# EAGLE board EasyBMS_Panel (EAGLE 9.6.2), part 1 of 2
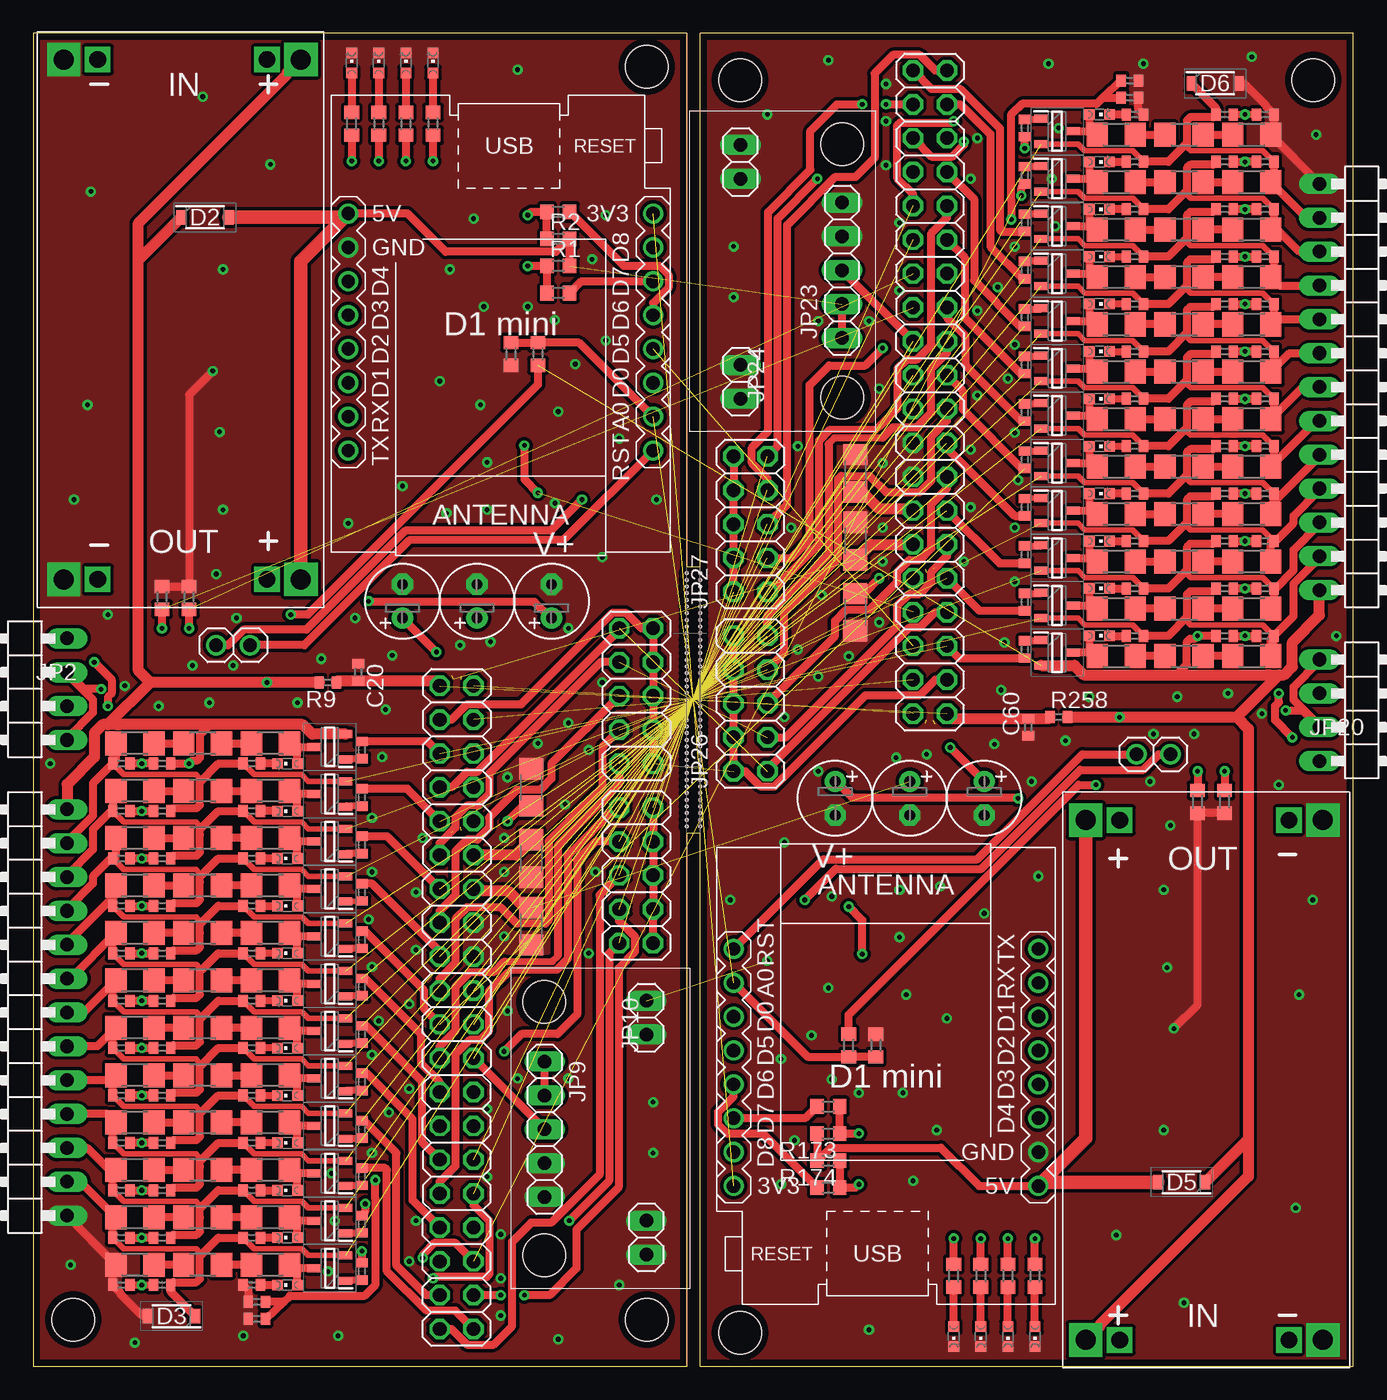
[diagram p0: board, top side]
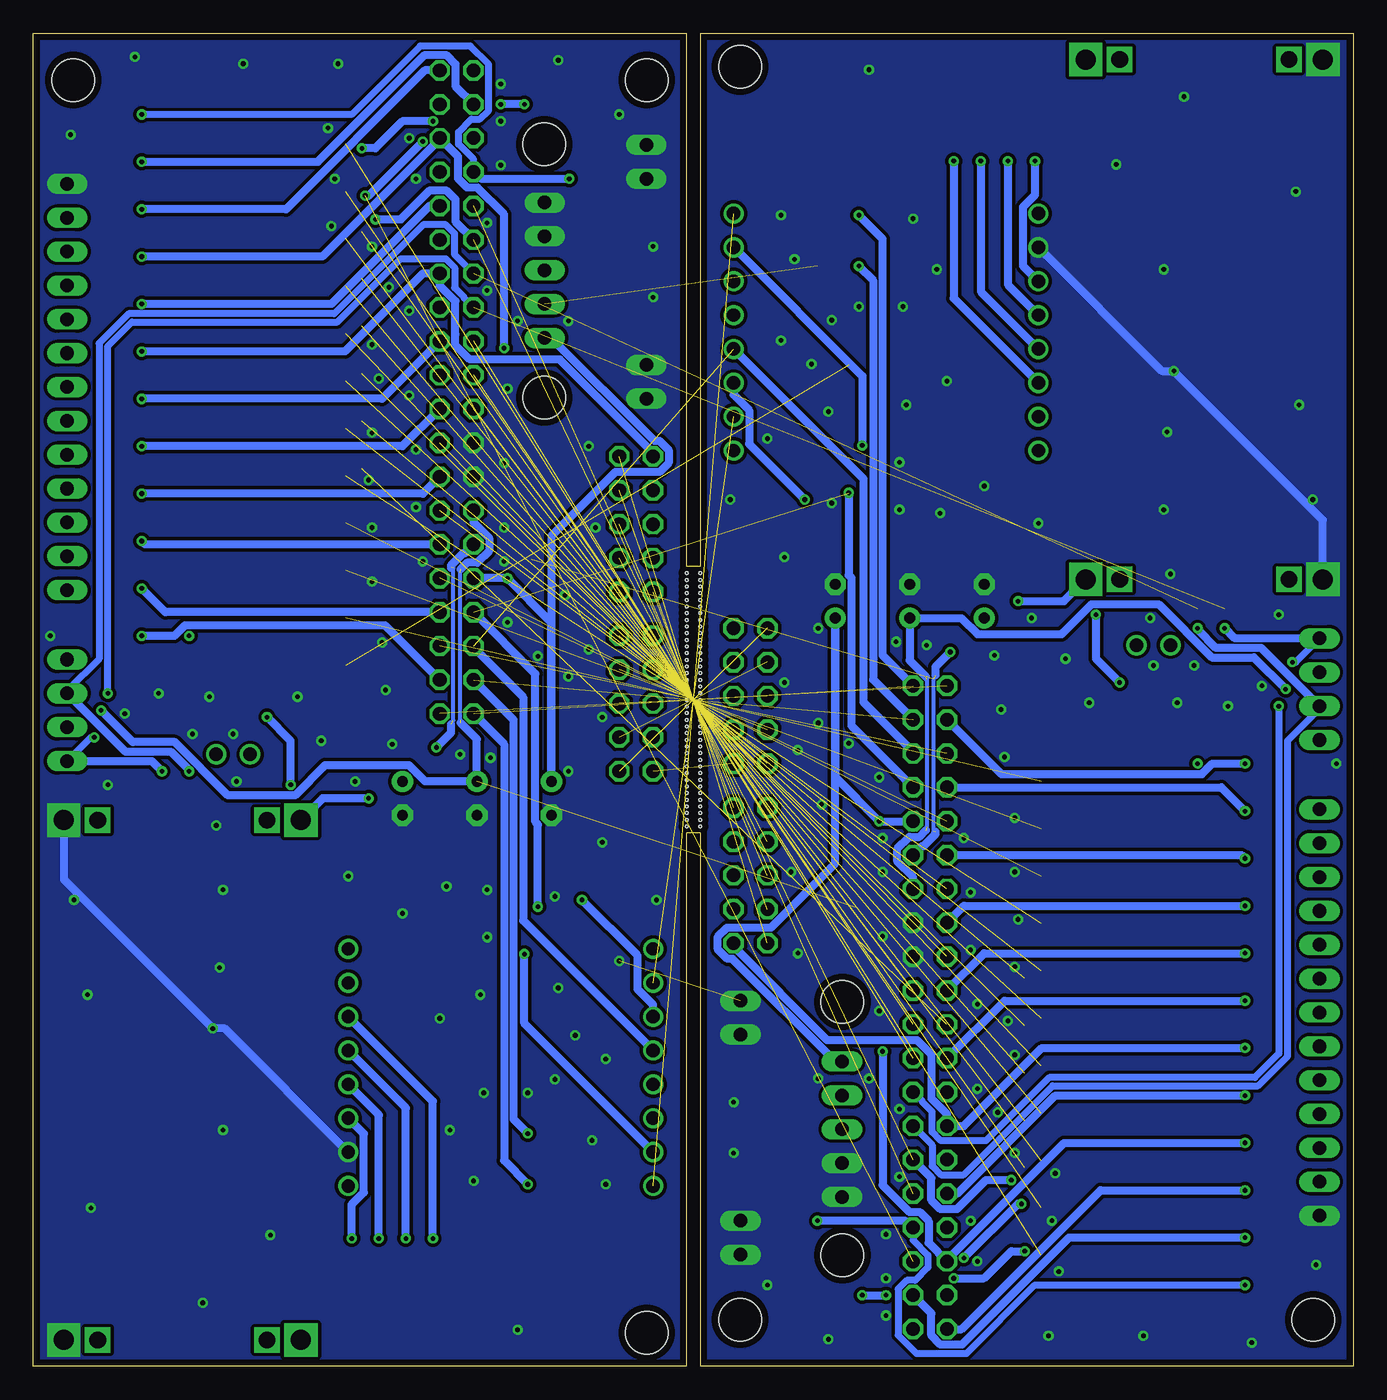
[diagram p1: board, bottom side, seen from below]

Size 99 x 100 mm. Coordinates in mm from the lower left corner, seen from the top.
Outline: 0,100 0,0 49,0 49,40 50,40 50,0 99,0 99,100 50,100 50,60 49,60 49,100 0,100
Copper layers (1*16): Top 0.035mm / dielectric 1.5mm / Bottom 0.035mm
Design rules "default *": minimum track width 11mil, minimum drill 0.2mm, track to track 4mil, track to pad 4mil, pad to pad 4mil, via to via 4mil, smd to smd 4mil, copper to edge 20mil, drill to drill 6mil, minimum pad ring 10mil, minimum via ring 8mil, stop-mask expansion 4mil, vias tented up to drill 0mil, thermal gap 10mil
Holes 3.2 mm at 3,3.5 46,3.5 46,97.5 38.31,27.33 38.31,8.33 96,96.5 53,96.5 53,2.5 60.69,72.67 60.69,91.67
Holes 0.2 mm at 49,54.5 50,54.5 50,54 50,53.5 50,53 50,52.5 50,52 50,51.5 50,51 50,50.5 50,50 50,49.5 50,49 50,48.5 50,47.5 50,48 50,47 50,46.5 50,45.5 50,46 49,45.5 49,46 49,46.5 49,47 49,47.5 49,48 49,48.5 49,49 49,49.5 49,50 49,50.5 49,51.5 49,51 49,52 49,52.5 49,53 49,53.5 49,54 49,55 50,55 50,55.5 50,56 50,56.5 50,57 49,57 49,56.5 49,56 49,55.5 49,45 49,44.5 49,44 49,43.5 49,43 50,43 50,43.5 50,44 50,44.5 50,45 49,57.5 50,57.5 50,58 50,58.5 50,59 50,59.5 49,59.5 49,59 49,58.5 49,58 49,42.5 49,42 49,41.5 49,41 49,40.5 50,40.5 50,41 50,41.5 50,42 50,42.5

## Footprints (pad centres in the part's own frame; a part is rotated, then mirrored left to right if it is on the bottom)
E2,5-6 = drill 0.813 pad 1.6: + -1.27,0 | drill 0.813 pad 1.6 octagon: - 1.27,0
C1206 = smd 1.6 x 1.8: 1 -1.4,0; 2 1.4,0
C0402 = smd 0.7 x 0.9: 1 -0.65,0; 2 0.65,0
SODFL3616X135N = smd 0.74 x 1.07: 1 -1.775,0; 2 1.775,0
1X13/90 = drill 1.016 long: 1 -15.24,-3.81; 2 -12.7,-3.81; 3 -10.16,-3.81; 4 -7.62,-3.81; 5 -5.08,-3.81; 6 -2.54,-3.81; 7 0,-3.81; 8 2.54,-3.81; 9 5.08,-3.81; 10 7.62,-3.81; 11 10.16,-3.81; 12 12.7,-3.81; 13 15.24,-3.81
1X04/90 = drill 1.016 long: 1 -3.81,-3.81; 2 -1.27,-3.81; 3 1.27,-3.81; 4 3.81,-3.81
1X02 = drill 1.016: 1 -1.27,0; 2 1.27,0
2X05 = drill 1.016 octagon: 1 -5.08,-1.27; 2 -5.08,1.27; 3 -2.54,-1.27; 4 -2.54,1.27; 5 0,-1.27; 6 0,1.27; 7 2.54,-1.27; 8 2.54,1.27; 9 5.08,-1.27; 10 5.08,1.27
2X20 = drill 1.016 octagon: 1 -24.13,-1.27; 2 -24.13,1.27; 3 -21.59,-1.27; 4 -21.59,1.27; 5 -19.05,-1.27; 6 -19.05,1.27; 7 -16.51,-1.27; 8 -16.51,1.27; 9 -13.97,-1.27; 10 -13.97,1.27; 11 -11.43,-1.27; 12 -11.43,1.27; 13 -8.89,-1.27; 14 -8.89,1.27; 15 -6.35,-1.27; 16 -6.35,1.27; 17 -3.81,-1.27; 18 -3.81,1.27; 19 -1.27,-1.27; 20 -1.27,1.27; 21 1.27,-1.27; 22 1.27,1.27; 23 3.81,-1.27; 24 3.81,1.27; 25 6.35,-1.27; 26 6.35,1.27; 27 8.89,-1.27; 28 8.89,1.27; 29 11.43,-1.27; 30 11.43,1.27; 31 13.97,-1.27; 32 13.97,1.27; 33 16.51,-1.27; 34 16.51,1.27; 35 19.05,-1.27; 36 19.05,1.27; 37 21.59,-1.27; 38 21.59,1.27; 39 24.13,-1.27; 40 24.13,1.27
1X05 = drill 1.016 long: 1 -5.08,0; 2 -2.54,0; 3 0,0; 4 2.54,0; 5 5.08,0
1X02' = drill 1.016 long: 1 -1.27,0; 2 1.27,0
CHIPLED_0603 = smd 0.8 x 0.8: A 0,-0.75; C 0,0.75
SOT96P237X111-3N = smd 1 x 0.6: 1 -1.2,0.955; 2 -1.2,-0.955; 3 1.2,0
R0603 = smd 1 x 1.1: 1 -0.85,0; 2 0.85,0
R0402 = smd 0.7 x 0.9: 1 -0.65,0; 2 0.65,0
R1206 = smd 1.6 x 1.803: 1 -1.422,0; 2 1.422,0
DC-DC-STEP-DOWN-LM2596HVS = drill 1.5 pad 2.5 square: IN+ 0,17.78; IN- 0,0; OUT+ 39,17.78; OUT- 39,0 | drill 1.27 pad 1.676 square: P$1 0,15.24; P$6 0,2.54; P$7 39,15.24; P$8 39,2.54
WEMOS-D1-MINI = drill 1: JP1.1 -11.43,9.525; JP1.2 -11.43,6.985; JP1.3 -11.43,4.445; JP1.4 -11.43,1.905; JP1.5 -11.43,-0.635; JP1.6 -11.43,-3.175; JP1.7 -11.43,-5.715; JP1.8 -11.43,-8.255; JP2.1 11.43,9.525; JP2.2 11.43,6.985; JP2.3 11.43,4.445; JP2.4 11.43,1.905; JP2.5 11.43,-0.635; JP2.6 11.43,-3.175; JP2.7 11.43,-5.715; JP2.8 11.43,-8.255

## Placement (x,y rotation side)
C1  1uF  [E2,5-6]  27.69,57.4 90 top
C2  1uF  [E2,5-6]  33.27,57.4 90 top
C3  1uF  [E2,5-6]  38.86,57.4 90 top
C4  100nF  [C1206]  37.34,33.01 270 top
C5  10nF  [C0402]  16.76,4.82 180 top
C6  10nF  [C0402]  6.6,6.09 180 top
C7  10nF  [C0402]  6.6,9.64 180 top
C8  10nF  [C0402]  6.6,16.76 180 top
C9  10nF  [C0402]  6.6,13.2 180 top
C10  10nF  [C0402]  6.6,20.31 180 top
C11  10nF  [C0402]  6.6,23.87 180 top
C12  10nF  [C0402]  6.6,27.42 180 top
C13  10nF  [C0402]  6.6,30.98 180 top
C14  10nF  [C0402]  6.6,34.54 180 top
C15  10nF  [C0402]  6.6,38.09 180 top
C16  10nF  [C0402]  6.6,41.65 180 top
C17  10nF  [C0402]  6.6,45.2 180 top
C18  100nF  [C1206]  37.34,38.09 270 top
C19  100nF  [C1206]  37.34,43.43 90 top
C20  100n  [C0402]  24.38,52.06 270 top
C41  1uF  [E2,5-6]  71.31,42.6 270 top
C42  1uF  [E2,5-6]  65.73,42.6 270 top
C43  1uF  [E2,5-6]  60.14,42.6 270 top
C44  10nF  [C0402]  82.24,95.18 0 top
C45  10nF  [C0402]  92.4,90.36 0 top
C46  10nF  [C0402]  92.4,93.91 0 top
C47  10nF  [C0402]  92.4,86.8 0 top
C48  10nF  [C0402]  92.4,83.24 0 top
C49  10nF  [C0402]  92.4,79.69 0 top
C50  10nF  [C0402]  92.4,76.13 0 top
C51  10nF  [C0402]  92.4,72.58 0 top
C52  10nF  [C0402]  92.4,69.02 0 top
C53  10nF  [C0402]  92.4,65.46 0 top
C54  10nF  [C0402]  92.4,61.91 0 top
C55  10nF  [C0402]  92.4,58.35 0 top
C56  10nF  [C0402]  92.4,54.8 0 top
C57  100nF  [C1206]  61.66,66.99 90 top
C58  100nF  [C1206]  61.66,61.91 90 top
C59  100nF  [C1206]  61.66,56.57 270 top
C60  100n  [C0402]  74.62,47.94 90 top
D2  SM4007PL-TP  [SODFL3616X135N]  12.88,86.19 0 top
D3  SM4007PL-TP  [SODFL3616X135N]  10.37,3.75 180 top
D5  SM4007PL-TP  [SODFL3616X135N]  86.12,13.8 180 top
D6  SM4007PL-TP  [SODFL3616X135N]  88.63,96.25 0 top
JP1  [1X13/90]  -1.27,26.54 90 top
JP2  [1X04/90]  -1.27,50.79 90 top
JP3  [1X02]  14.99,54.09 0 top
JP4  [2X05]  45.21,50.28 270 top
JP5  [2X20]  31.75,26.92 270 top
JP6  [2X05]  45.21,36.82 270 top
JP9  [1X05]  38.35,17.77 270 top
JP10  [1X02']  45.97,26.15 90 top
JP11  [1X02']  45.97,9.64 270 top
JP19  [1X13/90]  100.27,73.47 270 top
JP20  [1X04/90]  100.27,49.21 270 top
JP21  [1X02]  84.01,45.91 180 top
JP22  [2X20]  67.25,73.08 90 top
JP23  [1X05]  60.65,82.23 90 top
JP24  [1X02']  53.03,73.85 270 top
JP25  [1X02']  53.03,90.36 90 top
JP26  [2X05]  53.79,49.72 90 top
JP27  [2X05]  53.79,63.18 90 top
LED1  KT-0603R  [CHIPLED_0603]  29.97,97.78 0 top
LED2  KT-0603R  [CHIPLED_0603]  27.94,97.78 0 top
LED3  KT-0603R  [CHIPLED_0603]  25.91,97.78 0 top
LED4  KT-0603R  [CHIPLED_0603]  23.88,97.78 0 top
LED5  KT-0603R  [CHIPLED_0603]  19.05,6.09 90 top
LED6  KT-0603R  [CHIPLED_0603]  19.05,9.64 90 top
LED7  KT-0603R  [CHIPLED_0603]  19.05,16.76 90 top
LED8  KT-0603R  [CHIPLED_0603]  19.05,13.2 90 top
LED9  KT-0603R  [CHIPLED_0603]  19.05,20.31 90 top
LED11  KT-0603R  [CHIPLED_0603]  19.05,23.87 90 top
LED12  KT-0603R  [CHIPLED_0603]  19.05,27.42 90 top
LED13  KT-0603R  [CHIPLED_0603]  19.05,30.98 90 top
LED14  KT-0603R  [CHIPLED_0603]  19.05,34.54 90 top
LED15  KT-0603R  [CHIPLED_0603]  19.05,38.09 90 top
LED16  KT-0603R  [CHIPLED_0603]  19.05,41.65 90 top
LED17  KT-0603R  [CHIPLED_0603]  19.05,45.2 90 top
LED33  KT-0603R  [CHIPLED_0603]  75.12,2.22 180 top
LED34  KT-0603R  [CHIPLED_0603]  69.03,2.22 180 top
LED35  KT-0603R  [CHIPLED_0603]  71.06,2.22 180 top
LED36  KT-0603R  [CHIPLED_0603]  73.09,2.22 180 top
LED37  KT-0603R  [CHIPLED_0603]  79.95,90.36 270 top
LED38  KT-0603R  [CHIPLED_0603]  79.95,93.91 270 top
LED39  KT-0603R  [CHIPLED_0603]  79.95,86.8 270 top
LED40  KT-0603R  [CHIPLED_0603]  79.95,83.24 270 top
LED41  KT-0603R  [CHIPLED_0603]  79.95,79.69 270 top
LED42  KT-0603R  [CHIPLED_0603]  79.95,76.13 270 top
LED43  KT-0603R  [CHIPLED_0603]  79.95,72.58 270 top
LED44  KT-0603R  [CHIPLED_0603]  79.95,69.02 270 top
LED45  KT-0603R  [CHIPLED_0603]  79.95,65.46 270 top
LED46  KT-0603R  [CHIPLED_0603]  79.95,61.91 270 top
LED47  KT-0603R  [CHIPLED_0603]  79.95,58.35 270 top
LED48  KT-0603R  [CHIPLED_0603]  79.95,54.8 270 top
Q2  BSS84LT1G  [SOT96P237X111-3N]  22.23,7.36 180 top
Q3  BSS84LT1G  [SOT96P237X111-3N]  22.23,10.91 180 top
Q4  BSS84LT1G  [SOT96P237X111-3N]  22.23,18.03 180 top
Q5  BSS84LT1G  [SOT96P237X111-3N]  22.23,14.47 180 top
Q6  BSS84LT1G  [SOT96P237X111-3N]  22.23,21.58 180 top
Q7  BSS84LT1G  [SOT96P237X111-3N]  22.23,25.14 180 top
Q8  BSS84LT1G  [SOT96P237X111-3N]  22.23,28.69 180 top
Q9  BSS84LT1G  [SOT96P237X111-3N]  22.23,32.25 180 top
Q10  BSS84LT1G  [SOT96P237X111-3N]  22.23,35.81 180 top
Q11  BSS84LT1G  [SOT96P237X111-3N]  22.23,39.36 180 top
Q12  BSS84LT1G  [SOT96P237X111-3N]  22.23,42.92 180 top
Q13  BSS84LT1G  [SOT96P237X111-3N]  22.23,46.47 180 top
Q25  BSS84LT1G  [SOT96P237X111-3N]  76.78,89.09 0 top
Q26  BSS84LT1G  [SOT96P237X111-3N]  76.78,92.64 0 top
Q27  BSS84LT1G  [SOT96P237X111-3N]  76.78,85.53 0 top
Q28  BSS84LT1G  [SOT96P237X111-3N]  76.78,81.97 0 top
Q29  BSS84LT1G  [SOT96P237X111-3N]  76.78,78.42 0 top
Q30  BSS84LT1G  [SOT96P237X111-3N]  76.78,74.86 0 top
Q31  BSS84LT1G  [SOT96P237X111-3N]  76.78,71.31 0 top
Q32  BSS84LT1G  [SOT96P237X111-3N]  76.78,67.75 0 top
Q33  BSS84LT1G  [SOT96P237X111-3N]  76.78,64.19 0 top
Q34  BSS84LT1G  [SOT96P237X111-3N]  76.78,60.64 0 top
Q35  BSS84LT1G  [SOT96P237X111-3N]  76.78,57.08 0 top
Q36  BSS84LT1G  [SOT96P237X111-3N]  76.78,53.53 0 top
R1  5K1  [R0603]  39.37,82.54 0 top
R2  5K1  [R0603]  39.37,84.57 0 top
R3  100R  [R0402]  16.76,3.55 180 top
R4  10R0  [R1206]  7.62,7.61 0 top
R7  10R0  [R1206]  12.7,7.61 0 top
R8  10R0  [R1206]  17.78,7.61 0 top
R9  100R  [R0402]  22.1,51.3 180 top
R10  3.3k  [R0402]  24.64,7.1 270 top
R11  470R  [R0402]  16.38,6.09 180 top
R12  100R  [R0402]  9.65,6.09 0 top
R14  10R0  [R1206]  7.62,11.17 0 top
R15  470k  [R0603]  37.85,75.94 270 top
R16  27K  [R0603]  35.81,75.94 90 top
R20  10R0  [R1206]  12.7,11.17 0 top
R21  10R0  [R1206]  17.78,11.17 0 top
R22  3.3k  [R0402]  24.64,10.66 270 top
R23  470R  [R0402]  16.38,9.64 180 top
R24  100R  [R0402]  9.65,9.64 0 top
R25  10R0  [R1206]  7.62,18.28 0 top
R26  10R0  [R1206]  12.7,18.28 0 top
R27  10R0  [R1206]  17.78,18.28 0 top
R28  3.3k  [R0402]  24.64,17.77 270 top
R29  470R  [R0402]  16.38,16.76 180 top
R30  100R  [R0402]  9.65,16.76 0 top
R31  10R0  [R1206]  7.62,14.72 0 top
R32  10R0  [R1206]  12.7,14.72 0 top
R33  10R0  [R1206]  17.78,14.72 0 top
R34  3.3k  [R0402]  24.64,14.22 270 top
R35  470R  [R0402]  16.38,13.2 180 top
R36  100R  [R0402]  9.65,13.2 0 top
R37  10R0  [R1206]  7.62,21.84 0 top
R38  10R0  [R1206]  12.7,21.84 0 top
R39  10R0  [R1206]  17.78,21.84 0 top
R40  3.3k  [R0402]  24.64,21.33 270 top
R41  470R  [R0402]  16.38,20.31 180 top
R42  100R  [R0402]  9.65,20.31 0 top
R43  10R0  [R1206]  7.62,25.39 0 top
R44  10R0  [R1206]  12.7,25.39 0 top
R45  10R0  [R1206]  17.78,25.39 0 top
R46  3.3k  [R0402]  24.64,24.88 270 top
R47  470R  [R0402]  16.38,23.87 180 top
R48  100R  [R0402]  9.65,23.87 0 top
R49  10R0  [R1206]  7.62,28.95 0 top
R50  10R0  [R1206]  12.7,28.95 0 top
R51  10R0  [R1206]  17.78,28.95 0 top
R52  3.3k  [R0402]  24.64,28.44 270 top
R53  200R0  [R0603]  29.97,93.21 270 top
R54  200R0  [R0603]  27.94,93.21 270 top
R55  200R0  [R0603]  25.91,93.21 270 top
R56  200R0  [R0603]  23.88,93.21 270 top
R57  12k  [R0603]  11.68,57.65 270 top
R58  12k  [R0603]  9.65,57.65 270 top
R61  1k  [R0603]  39.37,86.61 180 top
R62  1k  [R0603]  39.37,80.51 180 top
R63  470R  [R0402]  16.38,27.42 180 top
R64  100R  [R0402]  9.65,27.42 0 top
R65  10R0  [R1206]  7.62,32.5 0 top
R66  10R0  [R1206]  12.7,32.5 0 top
R67  10R0  [R1206]  17.78,32.5 0 top
R68  3.3k  [R0402]  24.64,32 270 top
R69  470R  [R0402]  16.38,30.98 180 top
R70  100R  [R0402]  9.65,30.98 0 top
R71  10R0  [R1206]  7.62,36.06 0 top
R72  10R0  [R1206]  12.7,36.06 0 top
R73  10R0  [R1206]  17.78,36.06 0 top
R74  3.3k  [R0402]  24.64,35.55 270 top
R75  470R  [R0402]  16.38,34.54 180 top
R76  100R  [R0402]  9.65,34.54 0 top
R77  10R0  [R1206]  7.62,39.62 0 top
R78  10R0  [R1206]  12.7,39.62 0 top
R79  10R0  [R1206]  17.78,39.62 0 top
R80  3.3k  [R0402]  24.64,39.11 270 top
R81  470R  [R0402]  16.38,38.09 180 top
R83  100R  [R0402]  9.65,38.09 0 top
R84  10R0  [R1206]  7.62,43.17 0 top
R85  10R0  [R1206]  12.7,43.17 0 top
R86  10R0  [R1206]  17.78,43.17 0 top
R87  3.3k  [R0402]  24.64,42.66 270 top
R88  470R  [R0402]  16.38,41.65 180 top
R89  100R  [R0402]  9.65,41.65 0 top
R90  10R0  [R1206]  7.62,46.73 0 top
R91  10R0  [R1206]  12.7,46.73 0 top
R92  10R0  [R1206]  17.78,46.73 0 top
R93  3.3k  [R0402]  24.64,46.22 270 top
R94  470R  [R0402]  16.38,45.2 180 top
R95  100R  [R0402]  9.65,45.2 0 top
R173  5K1  [R0603]  59.63,17.46 180 top
R174  5K1  [R0603]  59.63,15.43 180 top
R175  470k  [R0603]  61.15,24.06 90 top
R176  27K  [R0603]  63.19,24.06 270 top
R177  200R0  [R0603]  69.03,6.79 90 top
R178  200R0  [R0603]  71.06,6.79 90 top
R179  200R0  [R0603]  73.09,6.79 90 top
R180  200R0  [R0603]  75.12,6.79 90 top
R181  12k  [R0603]  87.32,42.35 90 top
R182  12k  [R0603]  89.35,42.35 90 top
R183  1k  [R0603]  59.63,13.39 0 top
R184  1k  [R0603]  59.63,19.49 0 top
R185  100R  [R0402]  82.24,96.45 0 top
R186  10R0  [R1206]  91.38,88.83 180 top
R187  10R0  [R1206]  86.3,88.83 180 top
R188  10R0  [R1206]  81.22,88.83 180 top
R189  3.3k  [R0402]  74.36,89.34 90 top
R190  470R  [R0402]  82.62,90.36 0 top
R191  100R  [R0402]  89.35,90.36 180 top
R192  10R0  [R1206]  91.38,92.39 180 top
R193  10R0  [R1206]  86.3,92.39 180 top
R194  10R0  [R1206]  81.22,92.39 180 top
R195  3.3k  [R0402]  74.36,92.9 90 top
R196  470R  [R0402]  82.62,93.91 0 top
R197  100R  [R0402]  89.35,93.91 180 top
R198  10R0  [R1206]  91.38,85.28 180 top
R199  10R0  [R1206]  86.3,85.28 180 top
R200  10R0  [R1206]  81.22,85.28 180 top
R201  3.3k  [R0402]  74.36,85.78 90 top
R202  470R  [R0402]  82.62,86.8 0 top
R203  100R  [R0402]  89.35,86.8 180 top
R204  10R0  [R1206]  91.38,81.72 180 top
R205  10R0  [R1206]  86.3,81.72 180 top
R206  10R0  [R1206]  81.22,81.72 180 top
R207  3.3k  [R0402]  74.36,82.23 90 top
R208  470R  [R0402]  82.62,83.24 0 top
R209  100R  [R0402]  89.35,83.24 180 top
R210  10R0  [R1206]  91.38,78.16 180 top
R211  10R0  [R1206]  86.3,78.16 180 top
R212  10R0  [R1206]  81.22,78.16 180 top
R213  3.3k  [R0402]  74.36,78.67 90 top
R214  470R  [R0402]  82.62,79.69 0 top
R215  100R  [R0402]  89.35,79.69 180 top
R216  10R0  [R1206]  91.38,74.61 180 top
R217  10R0  [R1206]  86.3,74.61 180 top
R218  10R0  [R1206]  81.22,74.61 180 top
R219  3.3k  [R0402]  74.36,75.12 90 top
R220  470R  [R0402]  82.62,76.13 0 top
R221  100R  [R0402]  89.35,76.13 180 top
R222  10R0  [R1206]  91.38,71.05 180 top
R223  10R0  [R1206]  86.3,71.05 180 top
R224  10R0  [R1206]  81.22,71.05 180 top
R225  3.3k  [R0402]  74.36,71.56 90 top
R226  470R  [R0402]  82.62,72.58 0 top
R227  100R  [R0402]  89.35,72.58 180 top
R228  10R0  [R1206]  91.38,67.5 180 top
R229  10R0  [R1206]  86.3,67.5 180 top
R230  10R0  [R1206]  81.22,67.5 180 top
R231  3.3k  [R0402]  74.36,68 90 top
R232  470R  [R0402]  82.62,69.02 0 top
R233  100R  [R0402]  89.35,69.02 180 top
R234  10R0  [R1206]  91.38,63.94 180 top
R235  10R0  [R1206]  86.3,63.94 180 top
R236  10R0  [R1206]  81.22,63.94 180 top
R237  3.3k  [R0402]  74.36,64.45 90 top
R238  470R  [R0402]  82.62,65.46 0 top
R239  100R  [R0402]  89.35,65.46 180 top
R240  10R0  [R1206]  91.38,60.38 180 top
R241  10R0  [R1206]  86.3,60.38 180 top
R242  10R0  [R1206]  81.22,60.38 180 top
R243  3.3k  [R0402]  74.36,60.89 90 top
R244  470R  [R0402]  82.62,61.91 0 top
R245  100R  [R0402]  89.35,61.91 180 top
R246  10R0  [R1206]  91.38,56.83 180 top
R247  10R0  [R1206]  86.3,56.83 180 top
R248  10R0  [R1206]  81.22,56.83 180 top
R249  3.3k  [R0402]  74.36,57.34 90 top
R250  470R  [R0402]  82.62,58.35 0 top
R251  100R  [R0402]  89.35,58.35 180 top
R252  10R0  [R1206]  91.38,53.27 180 top
R253  10R0  [R1206]  86.3,53.27 180 top
R254  10R0  [R1206]  81.22,53.27 180 top
R255  3.3k  [R0402]  74.36,53.78 90 top
R256  470R  [R0402]  82.62,54.8 0 top
R257  100R  [R0402]  89.35,54.8 180 top
R258  100R  [R0402]  76.9,48.7 0 top
U$1  DC-DC-STEP-DOWN-LM2596HVS  [DC-DC-STEP-DOWN-LM2596HVS]  2.29,98.04 270 top
U$2  WEMOS-D1-MINI  [WEMOS-D1-MINI]  35.05,78.22 180 top
U$5  DC-DC-STEP-DOWN-LM2596HVS  [DC-DC-STEP-DOWN-LM2596HVS]  96.71,1.96 90 top
U$6  WEMOS-D1-MINI  [WEMOS-D1-MINI]  63.95,21.78 0 top

## Library data of the parts
C1-C20 C41-C60 R1-R4 R7-R12 R14-R16 R20-R58 R61-R81 R83-R95 R173-R258 = rcl
D2 D3 D5 D6 = SamacSys_Parts; DESCRIPTION: Rectifiers 1A, 1000V 1A, 1000V; HEIGHT: 1.35mm; MANUFACTURER_NAME: Micro Commercial Components (MCC); MANUFACTURER_PART_NUMBER: SM4007PL-TP; MOUSER_PART_NUMBER: 833-SM4007PL-TP; MOUSER_PRICE-STOCK: https://www.mouser.co.uk/ProductDetail/Micro-Commercial-Components-MCC/SM4007PL-TP?qs=SdqRYZZ9IxCh9ylwm1K3UA%3D%3D
JP1 JP2 JP4-JP6 JP9-JP11 JP19 JP20 JP22-JP27 = pinhead
JP3 JP21 = pinhead_own
LED1-LED9 LED11-LED17 LED33-LED48 = led
Q2-Q13 Q25-Q36 = SamacSys_Parts; DESCRIPTION: MOSFET 50V 130mA P-Channel; HEIGHT: 1.11mm; MANUFACTURER_NAME: ON Semiconductor; MANUFACTURER_PART_NUMBER: BSS84LT1G; MOUSER_PART_NUMBER: 863-BSS84LT1G; MOUSER_PRICE-STOCK: https://www.mouser.co.uk/ProductDetail/ON-Semiconductor/BSS84LT1G?qs=vNc2DXHODiKIGu9QIvMAfw%3D%3D
U$1 U$2 U$5 U$6 = diy-modules

## Nets
3V3: U$2.JP1.8 U$6.JP1.8
5VDC: C3.+ C19.1 C43.+ C59.1 D2.2 D5.2 JP5.10 JP9.1 JP9.2 JP22.10 JP23.1 JP23.2 R1.2 R2.2 R173.2 R174.2 U$1.OUT+ U$2.JP2.8 U$5.OUT+ U$6.JP2.8
A0IN: R15.1 R16.2 R175.1 R176.2 U$2.JP1.2 U$6.JP1.2
C0: C5.1 C44.1 JP5.30 JP22.30 R3.1 R185.1
C1: C6.1 C46.1 JP5.34 JP6.9 JP22.34 JP27.9 R12.1 R197.1
C2: C7.1 C45.1 JP5.38 JP6.7 JP22.38 JP27.7 R24.1 R191.1
C3: C9.1 C47.1 JP5.39 JP6.5 JP22.39 JP27.5 R36.1 R203.1
C4: C8.1 C48.1 JP5.35 JP6.3 JP22.35 JP27.3 R30.1 R209.1
C5: C10.1 C49.1 JP5.31 JP6.1 JP22.31 JP27.1 R42.1 R215.1
C6: C11.1 C50.1 JP5.27 JP6.2 JP6.4 JP6.6 JP6.8 JP6.10 JP22.27 JP27.2 JP27.4 JP27.6 JP27.8 JP27.10 R48.1 R221.1
C7: C12.1 C51.1 JP4.9 JP5.23 JP22.23 JP26.9 R64.1 R227.1
C8: C13.1 C52.1 JP4.7 JP5.19 JP22.19 JP26.7 R70.1 R233.1
C9: C14.1 C53.1 JP4.5 JP5.15 JP22.15 JP26.5 R76.1 R239.1
C10: C15.1 C54.1 JP4.3 JP5.11 JP22.11 JP26.3 R83.1 R245.1
C11: C16.1 C55.1 JP4.1 JP5.7 JP22.7 JP26.1 R89.1 R251.1
C12: C17.1 C56.1 JP4.2 JP4.4 JP4.6 JP4.8 JP4.10 JP5.3 JP22.3 JP26.2 JP26.4 JP26.6 JP26.8 JP26.10 R95.1 R257.1
CSB: JP5.8 JP22.8 U$2.JP1.7 U$6.JP1.7
GND: C1.- C2.- C3.- C4.2 C5.2 C6.2 C18.2 C19.2 C20.1 C41.- C42.- C43.- C44.2 C46.2 C57.2 C58.2 C59.2 C60.1 D3.2 D6.2 JP1.1 JP5.16 JP5.18 JP9.4 JP9.5 JP10.1 JP10.2 JP11.1 JP11.2 JP19.1 JP22.16 JP22.18 JP23.4 JP23.5 JP24.1 JP24.2 JP25.1 JP25.2 LED1.C LED2.C LED3.C LED4.C LED33.C LED34.C LED35.C LED36.C R3.2 R4.1 R11.2 R16.1 R57.1 R58.1 R176.1 R181.1 R182.1 R185.2 R192.1 R196.2 U$1.IN- U$1.OUT- U$2.JP2.7 U$5.IN- U$5.OUT- U$6.JP2.7
GPIO4: JP5.22 JP22.22
GPIO5: JP5.20 JP22.20
ISIGNAL: JP5.24 JP9.3 JP22.24 JP23.3
MISO: JP5.2 JP22.2 R2.1 R61.2 R174.1 R183.2
MOSI: JP5.4 JP22.4 R1.1 R62.2 R173.1 R184.2
N$1: LED1.A R53.1
N$2: LED2.A R54.1
N$3: LED3.A R55.1
N$4: LED4.A R56.1
N$5: JP3.2 U$2.JP1.1
N$6: JP3.1 U$2.JP1.3
N$8: R4.2 R7.1
N$9: R7.2 R8.1
N$10: LED5.A Q2.3 R8.2
N$11: Q2.1 R10.2
N$12: LED5.C R11.1
N$13: R14.2 R20.1
N$14: R20.2 R21.1
N$16: LED6.A Q3.3 R21.2
N$19: Q3.1 R22.2
N$20: LED6.C R23.1
N$21: R25.2 R26.1
N$22: R26.2 R27.1
N$23: LED7.A Q4.3 R27.2
N$24: Q4.1 R28.2
N$26: LED7.C R29.1
N$27: R31.2 R32.1
N$28: R32.2 R33.1
N$29: LED8.A Q5.3 R33.2
N$30: R56.2 U$2.JP2.6
N$31: Q5.1 R34.2
N$32: LED8.C R35.1
N$33: R37.2 R38.1
N$34: R38.2 R39.1
N$35: LED9.A Q6.3 R39.2
N$36: Q6.1 R40.2
N$37: LED9.C R41.1
N$38: R43.2 R44.1
N$39: R44.2 R45.1
N$40: LED11.A Q7.3 R45.2
N$41: Q7.1 R46.2
N$42: LED11.C R47.1
N$43: R49.2 R50.1
N$44: R50.2 R51.1
N$45: LED12.A Q8.3 R51.2
N$46: Q8.1 R52.2
N$47: LED12.C R63.1
N$48: R65.2 R66.1
N$49: R66.2 R67.1
N$50: LED13.A Q9.3 R67.2
N$51: Q9.1 R68.2
N$52: LED13.C R69.1
N$53: R71.2 R72.1
N$54: R72.2 R73.1
N$55: LED14.A Q10.3 R73.2
N$56: Q10.1 R74.2
N$57: LED14.C R75.1
N$58: R77.2 R78.1
N$59: R78.2 R79.1
N$60: LED15.A Q11.3 R79.2
N$61: Q11.1 R80.2
N$62: LED15.C R81.1
N$63: R84.2 R85.1
N$64: R85.2 R86.1
N$65: LED16.A Q12.3 R86.2
N$66: Q12.1 R87.2
N$67: LED16.C R88.1
N$68: R90.2 R91.1
N$69: R91.2 R92.1
N$70: R53.2 U$2.JP2.3
N$71: LED17.A Q13.3 R92.2
N$72: Q13.1 R93.2
N$73: R61.1 U$2.JP1.5
N$74: LED17.C R94.1
N$119: R62.1 U$2.JP1.6
N$120: R55.2 U$2.JP2.5
N$124: R54.2 U$2.JP2.4
N$145: LED34.A R177.1
N$146: LED35.A R178.1
N$147: LED36.A R179.1
N$148: LED33.A R180.1
N$149: R177.2 U$6.JP2.3
N$150: R180.2 U$6.JP2.6
N$151: R179.2 U$6.JP2.5
N$152: R178.2 U$6.JP2.4
N$153: R183.1 U$6.JP1.5
N$154: R184.1 U$6.JP1.6
N$155: JP21.2 U$6.JP1.1
N$156: JP21.1 U$6.JP1.3
N$157: R186.2 R187.1
N$158: R187.2 R188.1
N$159: LED37.A Q25.3 R188.2
N$160: Q25.1 R189.2
N$161: LED37.C R190.1
N$162: R192.2 R193.1
N$163: R193.2 R194.1
N$164: LED38.A Q26.3 R194.2
N$165: Q26.1 R195.2
N$166: LED38.C R196.1
N$167: R198.2 R199.1
N$168: R199.2 R200.1
N$169: LED39.A Q27.3 R200.2
N$170: Q27.1 R201.2
N$171: LED39.C R202.1
N$172: R204.2 R205.1
N$173: R205.2 R206.1
N$174: LED40.A Q28.3 R206.2
N$175: Q28.1 R207.2
N$176: LED40.C R208.1
N$177: R210.2 R211.1
N$178: R211.2 R212.1
N$179: LED41.A Q29.3 R212.2
N$180: Q29.1 R213.2
N$181: LED41.C R214.1
N$182: R216.2 R217.1
N$183: R217.2 R218.1
N$184: LED42.A Q30.3 R218.2
N$185: Q30.1 R219.2
N$186: LED42.C R220.1
N$187: R222.2 R223.1
N$188: R223.2 R224.1
N$189: LED43.A Q31.3 R224.2
N$190: Q31.1 R225.2
N$191: LED43.C R226.1
N$192: R228.2 R229.1
N$193: R229.2 R230.1
N$194: LED44.A Q32.3 R230.2
N$195: Q32.1 R231.2
N$196: LED44.C R232.1
N$197: R234.2 R235.1
N$198: R235.2 R236.1
N$199: LED45.A Q33.3 R236.2
N$200: Q33.1 R237.2
N$201: LED45.C R238.1
N$205: R240.2 R241.1
N$239: R241.2 R242.1
N$240: LED46.A Q34.3 R242.2
N$241: Q34.1 R243.2
N$242: LED46.C R244.1
N$243: R246.2 R247.1
N$244: R247.2 R248.1
N$245: LED47.A Q35.3 R248.2
N$246: Q35.1 R249.2
N$247: LED47.C R250.1
N$248: R252.2 R253.1
N$249: R253.2 R254.1
N$250: LED48.A Q36.3 R254.2
N$251: Q36.1 R255.2
N$252: LED48.C R256.1
P2: C7.2 C45.2 D3.1 D6.1 JP1.2 JP19.2 Q2.2 Q26.2 R12.2 R14.1 R23.2 R186.1 R190.2 R197.2
P3: C9.2 C47.2 JP1.3 JP19.3 Q3.2 Q25.2 R24.2 R31.1 R35.2 R191.2 R198.1 R202.2
P4: C8.2 C48.2 JP1.4 JP19.4 Q5.2 Q27.2 R25.1 R29.2 R36.2 R203.2 R204.1 R208.2
P5: C10.2 C49.2 JP1.5 JP19.5 Q4.2 Q28.2 R30.2 R37.1 R41.2 R209.2 R210.1 R214.2
P6: C11.2 C50.2 JP1.6 JP19.6 Q6.2 Q29.2 R42.2 R43.1 R47.2 R215.2 R216.1 R220.2
P7: C12.2 C51.2 JP1.7 JP19.7 Q7.2 Q30.2 R48.2 R49.1 R63.2 R221.2 R222.1 R226.2
P8: C13.2 C52.2 JP1.8 JP19.8 Q8.2 Q31.2 R64.2 R65.1 R69.2 R227.2 R228.1 R232.2
P9: C14.2 C53.2 JP1.9 JP19.9 Q9.2 Q32.2 R70.2 R71.1 R75.2 R233.2 R234.1 R238.2
P10: C15.2 C54.2 JP1.10 JP19.10 Q10.2 Q33.2 R76.2 R77.1 R81.2 R239.2 R240.1 R244.2
P11: C16.2 C55.2 JP1.11 JP19.11 Q11.2 Q34.2 R83.2 R84.1 R88.2 R245.2 R246.1 R250.2
P12: C17.2 C56.2 JP1.12 JP19.12 Q12.2 Q35.2 R89.2 R90.1 R94.2 R251.2 R252.1 R256.2
P13: D2.1 D5.1 JP1.13 JP19.13 Q13.2 Q36.2 R9.2 R15.2 R95.2 R175.2 R257.2 R258.2 U$1.IN+ U$5.IN+
S1: JP5.32 JP22.32 R10.1 R195.1
S2: JP5.36 JP22.36 R22.1 R189.1
S3: JP5.40 JP22.40 R34.1 R201.1
S4: JP5.37 JP22.37 R28.1 R207.1
S5: JP5.33 JP22.33 R40.1 R213.1
S6: JP5.29 JP22.29 R46.1 R219.1
S7: JP5.25 JP22.25 R52.1 R225.1
S8: JP5.21 JP22.21 R68.1 R231.1
S9: JP5.17 JP22.17 R74.1 R237.1
S10: JP5.13 JP22.13 R80.1 R243.1
S11: JP5.9 JP22.9 R87.1 R249.1
S12: JP5.5 JP22.5 R93.1 R255.1
SCK: JP5.6 JP22.6 U$2.JP1.4 U$6.JP1.4
V+: C20.2 C60.2 JP5.1 JP22.1 R9.1 R258.1
VREF1: C1.+ C18.1 C41.+ C58.1 JP5.12 JP22.12
VREF2: C2.+ C4.1 C42.+ C57.1 JP2.1 JP2.3 JP5.14 JP20.1 JP20.3 JP22.14
VTEMP1: JP2.2 JP5.28 JP20.2 JP22.28 R57.2 R181.2
VTEMP2: JP2.4 JP5.26 JP20.4 JP22.26 R58.2 R182.2